# Altium PCB 主板-双BH(1).PcbDoc (part 11 of 13)
Units mm, origin at the board's own origin, x right, y up, seen from the top; angles counter-clockwise.
Board outline 97.69 x 103.45 mm, 2 copper layers (Top Layer, Bottom Layer); 78 components, 75 nets, 243 pads, 279 vias.
Unrouted connection lines stored in the file: 7.
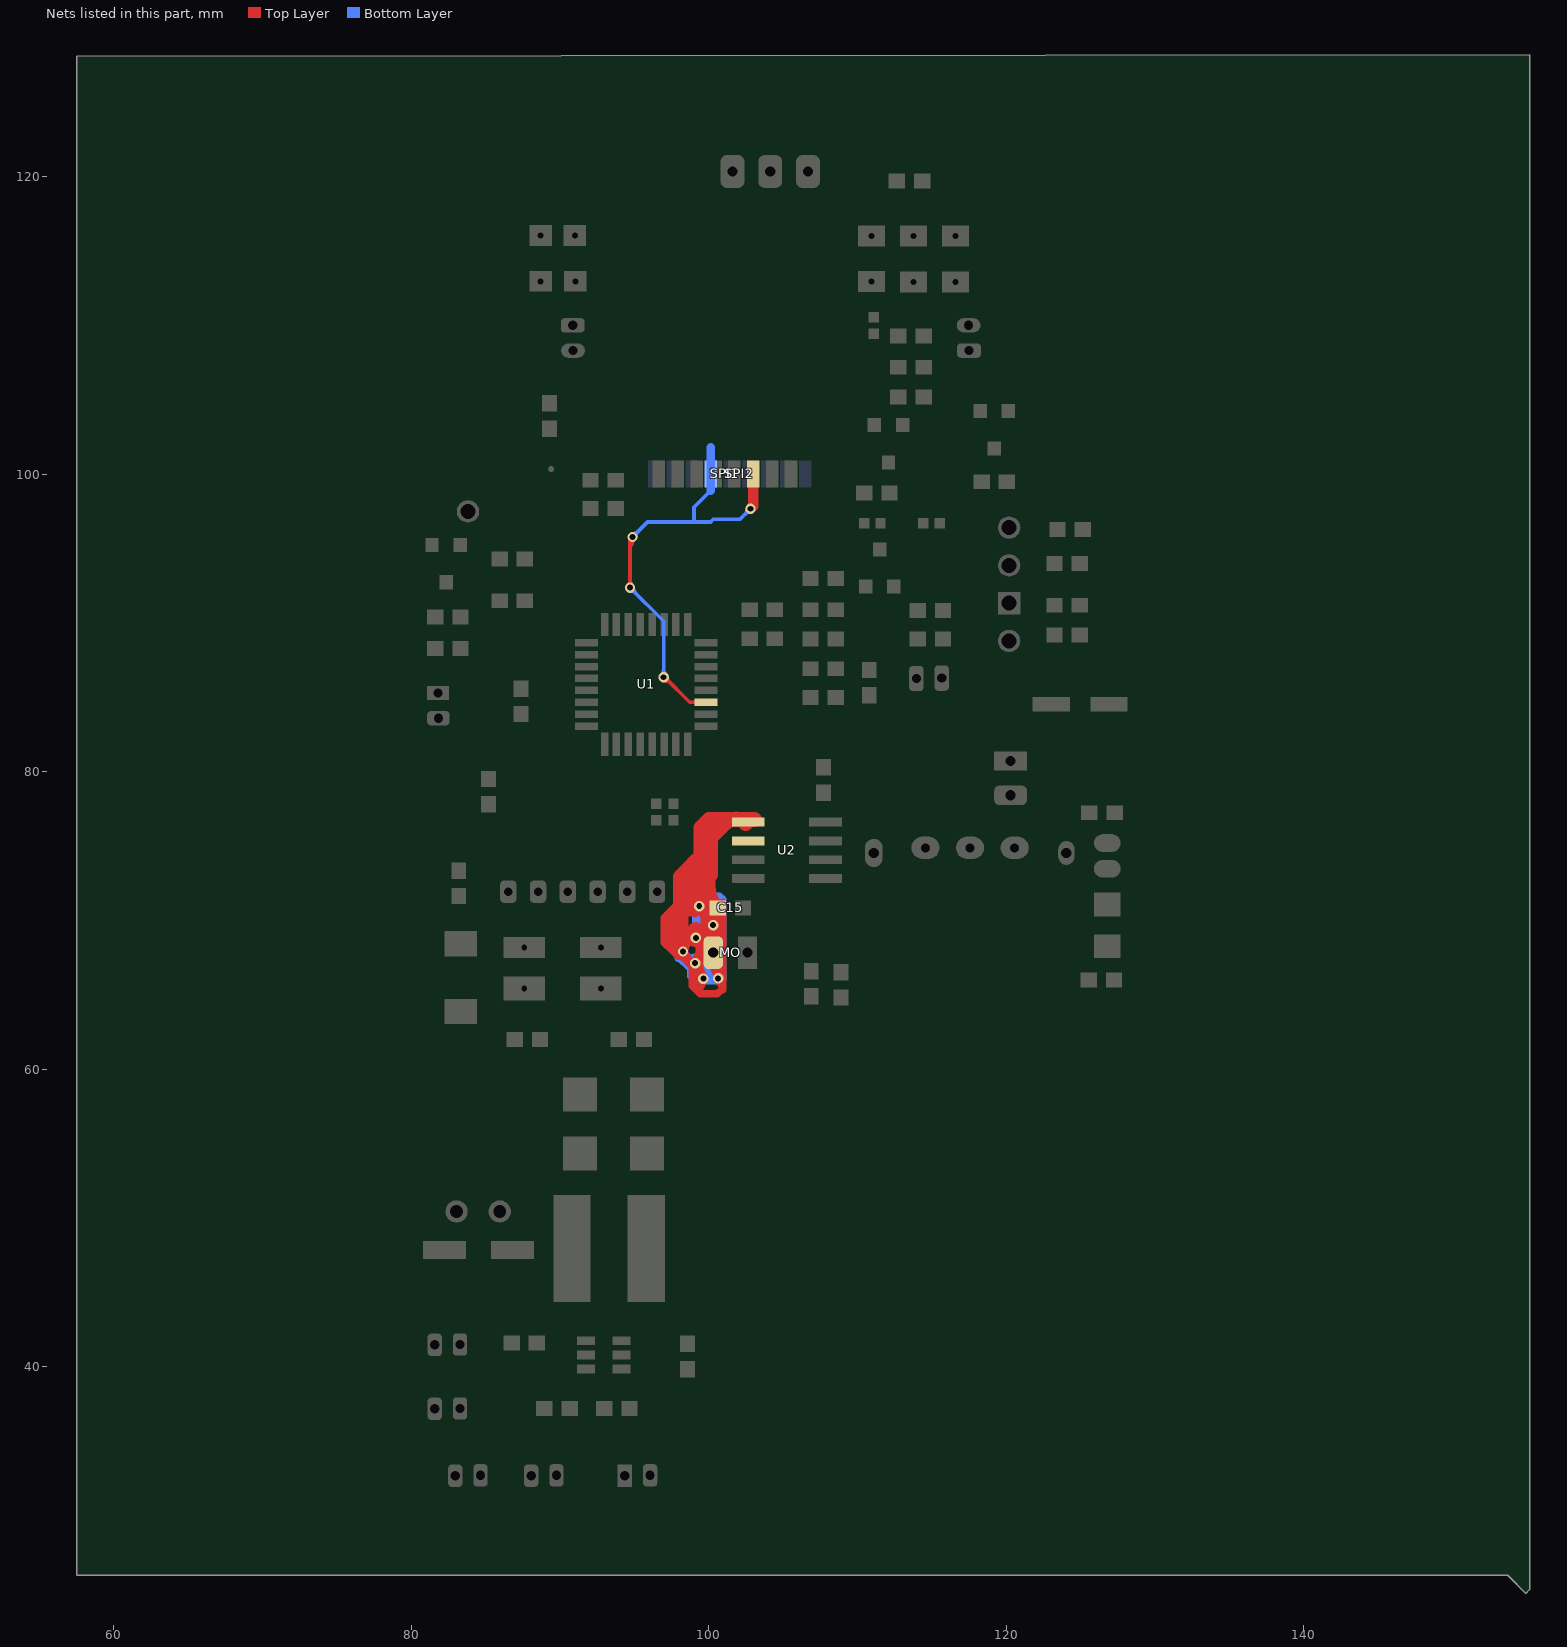
[diagram p11: the nets of this part, all layers, seen from the top]

## Via types
v1: diameter 0.7, hole 0.4, Top Layer to Bottom Layer, 108 vias
v2: diameter 0.68, hole 0.4, Top Layer to Bottom Layer, 87 vias
v3: diameter 0.8, hole 0.5, Top Layer to Bottom Layer, tented both sides, 33 vias
v4: diameter 0.6, hole 0.4, Top Layer to Bottom Layer, 12 vias
v5: diameter 0.9, hole 0.5, Top Layer to Bottom Layer, 8 vias
v6: diameter 0.8, hole 0.5, Top Layer to Bottom Layer, 6 vias
v7: diameter 1, hole 0.75, Top Layer to Bottom Layer, tented both sides, 5 vias
v8: diameter 3.4, hole 2.9, Top Layer to Bottom Layer, 4 vias
v9: diameter 1, hole 0.6, Top Layer to Bottom Layer, tented both sides, 3 vias
v10: diameter 1, hole 0.56, Top Layer to Bottom Layer, tented both sides, 2 vias
v11: diameter 1.1, hole 0.68, Top Layer to Bottom Layer, 2 vias
v12: diameter 0.8, hole 0.4, Top Layer to Bottom Layer, 2 vias
v13: diameter 0.65, hole 0.4, Top Layer to Bottom Layer, tented both sides, 2 vias
v14: diameter 1, hole 0.6, Top Layer to Bottom Layer, tented bottom, 1 vias
v15: diameter 0.7, hole 0.4, Top Layer to Bottom Layer, tented bottom, 1 vias
v16: diameter 0.95, hole 0.5, Top Layer to Bottom Layer, 1 vias
v17: diameter 0.64, hole 0.4, Top Layer to Bottom Layer, 1 vias
v18: diameter 0.62, hole 0.4, Top Layer to Bottom Layer, 1 vias

## Nets (pads, with @x,y where several pads share a name; then routed paths per layer and width w, separated by ;. In a path a pad name is that pad's centre, name@x,y a point inside that pad or via, vN(x,y) a via of type N, cw(c..) or ccw(c..) an arc to the next point about the centre after c; other vN are vias at no path point) (continued)
MOSI: SPI1.3 SPI2.3 U1.3 | length 52.4
  Top Layer w0.254: v2@94.717,92.405 v2@94.717,95.783 ; v2@97.066,86.347 98.73,84.684 U1.3@99.825,84.684 ; v2@94.566,92.53 ccw(c94.202,92.894) 94.717,92.894 ; v2@94.566,92.53 ccw(c94.202,92.894) 94.717,92.894 ; v2@94.566,92.53 ccw(c94.202,92.894) 94.717,92.894 ; 94.717,92.894 ccw(c95.231,92.894) v2@94.867,92.53 ; 94.717,92.894 ccw(c95.231,92.894) v2@94.867,92.53 ; 94.717,92.894 ccw(c95.231,92.894) v2@94.867,92.53 ; 94.717,94.901 cw(c95.751,94.901) v2@95.02,95.633 ; 94.717,94.901 cw(c95.751,94.901) v2@95.02,95.633 ; 94.717,94.901 cw(c95.751,94.901) v2@95.02,95.633 ; v2@94.741,95.613 cw(c94.584,95.403) 94.811,95.272 ; v2@94.741,95.613 cw(c94.584,95.403) 94.811,95.272 ; v2@94.741,95.613 cw(c94.584,95.403) 94.811,95.272 ; v2@96.938,86.347 ccw(c97.322,86.473) 97.218,86.083 ; v2@96.938,86.347 ccw(c97.322,86.473) 97.218,86.083 ; v2@96.938,86.347 ccw(c97.322,86.473) 97.218,86.083 ; v2@96.977,86.147 cw(c96.977,85.449) 97.471,85.943 ; v2@96.977,86.147 cw(c96.977,85.449) 97.471,85.943 ; v2@96.977,86.147 cw(c96.977,85.449) 97.471,85.943 ; v2@97.19,86.36 ccw(c97.52,86.36) 97.287,86.126 ; v2@97.19,86.36 ccw(c97.52,86.36) 97.287,86.126 ; v2@97.19,86.36 ccw(c97.52,86.36) 97.287,86.126 ; 98.988,84.684 cw(c98.988,84.365) U1.3@99.213,84.59 ; 98.988,84.684 cw(c98.988,84.365) U1.3@99.213,84.59 ; 98.988,84.684 cw(c98.988,84.365) U1.3@99.213,84.59 ; 99.018,84.684 ccw(c99.018,84.959) U1.3@99.213,84.764 ; 99.018,84.684 ccw(c99.018,84.959) U1.3@99.213,84.764 ; 99.018,84.684 ccw(c99.018,84.959) U1.3@99.213,84.764
  Top Layer w0.7: v2(102.819,97.688) v2@102.997,97.866 ; 102.997,97.993 SPI1.3@102.997,100.032 ; v2@102.826,97.681 ccw(c102.414,98.094) 102.997,98.094 ; v2@102.826,97.681 ccw(c102.414,98.094) 102.997,98.094 ; v2@102.826,97.681 ccw(c102.414,98.094) 102.997,98.094
  Bottom Layer w0.254: v2(94.717,92.38) 96.977,90.119 v2(96.977,86.36) ; v2(94.869,95.783) 95.885,96.799 100.13,96.799 100.308,96.977 102.108,96.977 v2(102.819,97.688) ; 99.009,96.799 99.009,97.79 100.14,98.921 ; v2@94.717,92.167 cw(c94.717,91.653) 95.08,92.016 ; v2@94.717,92.167 cw(c94.717,91.653) 95.08,92.016 ; v2@94.717,92.167 cw(c94.717,91.653) 95.08,92.016 ; v2@94.869,95.996 ccw(c94.869,96.511) 95.233,96.147 ; v2@94.869,95.996 ccw(c94.869,96.511) 95.233,96.147 ; v2@94.869,95.996 ccw(c94.869,96.511) 95.233,96.147 ; v2@94.93,92.38 ccw(c95.444,92.38) 95.08,92.016 ; v2@94.93,92.38 ccw(c95.444,92.38) 95.08,92.016 ; v2@94.93,92.38 ccw(c95.444,92.38) 95.08,92.016 ; v2@95.082,95.783 cw(c95.596,95.783) 95.233,96.147 ; v2@95.082,95.783 cw(c95.596,95.783) 95.233,96.147 ; v2@95.082,95.783 cw(c95.596,95.783) 95.233,96.147 ; v2@96.827,86.511 ccw(c96.463,86.874) 96.977,86.874 ; v2@96.827,86.511 ccw(c96.463,86.874) 96.977,86.874 ; v2@96.827,86.511 ccw(c96.463,86.874) 96.977,86.874 ; 96.977,86.874 ccw(c97.491,86.874) v2@97.128,86.511 ; 96.977,86.874 ccw(c97.491,86.874) v2@97.128,86.511 ; 96.977,86.874 ccw(c97.491,86.874) v2@97.128,86.511 ; 102.456,97.325 ccw(c102.092,97.688) v2@102.606,97.688 ; 102.456,97.325 cw(c102.819,96.961) v2@102.819,97.475 ; 102.456,97.325 ccw(c102.092,97.688) v2@102.606,97.688 ; 102.456,97.325 cw(c102.819,96.961) v2@102.819,97.475 ; 102.456,97.325 ccw(c102.092,97.688) v2@102.606,97.688 ; 102.456,97.325 cw(c102.819,96.961) v2@102.819,97.475
  Bottom Layer w0.6: 100.14,98.921 100.14,101.803
NetC4_1: C15.1 MO.2 U2.5 U2.6 | length 590
  Top Layer w0.254: 97.206,69.723 97.231,69.698 ; 97.231,70.202 97.231,69.698 ; 97.447,67.958 97.585,67.958 97.828,67.958 ; 97.079,69.367 96.952,69.367 97.231,69.647 ; 97.079,69.367 97.561,69.367 97.257,69.672 ; 97.079,69.367 96.977,69.266 96.977,68.809 97.024,68.762 97.828,67.958 ; 97.079,69.367 97.231,69.52 97.231,69.647 ; 97.198,68.588 ccw(c98.273,69.662) v1@98.273,68.143 ; 97.198,68.588 ccw(c98.273,69.662) v1@98.273,68.143 ; 97.198,68.588 ccw(c98.273,69.662) v1@98.273,68.143 ; 97.231,69.647 97.231,69.698 ; 97.231,69.647 97.257,69.672 ; 97.231,69.698 97.257,69.672 ; 97.632,68.154 ccw(c98.273,68.795) v1@98.273,67.889 ; 97.632,68.154 ccw(c98.273,68.795) v1@98.273,67.889 ; 97.632,68.154 ccw(c98.273,68.795) v1@98.273,67.889 ; 97.642,67.958 cw(c97.642,67.289) v1@98.115,67.762 ; 97.642,67.958 cw(c97.642,67.289) v1@98.115,67.762 ; 97.642,67.958 cw(c97.642,67.289) v1@98.115,67.762 ; 97.826,67.958 ccw(c97.826,68.366) v1@98.115,68.077 ; 97.826,67.958 ccw(c97.826,68.366) v1@98.115,68.077 ; 97.826,67.958 ccw(c97.826,68.366) v1@98.115,68.077 ; 97.828,67.958 ccw(c97.828,68.361) v1@98.114,68.077 ; 97.828,67.958 cw(c97.828,67.672) v1@98.078,67.811 ; 97.828,67.958 ccw(c97.828,68.361) v1@98.114,68.077 ; 97.828,67.958 cw(c97.828,67.672) v1@98.078,67.811 ; 97.828,67.958 ccw(c97.828,68.361) v1@98.114,68.077 ; 97.828,67.958 cw(c97.828,67.672) v1@98.078,67.811 ; 97.87,67.997 ccw(c97.93,68.223) v1@98.106,68.068 ; 97.87,67.997 cw(c97.79,67.7) v1@98.07,67.827 ; 97.87,67.997 ccw(c97.93,68.223) v1@98.106,68.068 ; 97.87,67.997 cw(c97.79,67.7) v1@98.07,67.827 ; 97.87,67.997 ccw(c97.93,68.223) v1@98.106,68.068 ; 97.87,67.997 cw(c97.79,67.7) v1@98.07,67.827 ; 97.898,68.243 cw(c97.727,67.605) v1@98.299,67.935 ; 97.898,68.243 cw(c97.727,67.605) v1@98.299,67.935 ; 97.898,68.243 cw(c97.727,67.605) v1@98.299,67.935
  Top Layer w0.5: 97.184,69.295 97.561,69.672 97.565,69.676 ; 98.091,70.202 97.024,70.202 ; v1@98.095,67.869 v1@98.146,67.818 ; 98.095,70.206 98.4,70.51 ; 98.095,70.507 98.098,70.51 98.4,70.51 ; 98.095,71.272 97.024,70.202 ; 98.179,68.301 98.4,68.301 ; v1(98.273,67.92) 97.968,67.818 v1@98.146,67.818 ; v1@98.294,67.67 v1@98.146,67.818 ; v1@98.882,67.158 98.222,67.818 v1@98.146,67.818 ; v1@99.185,67.142 ccw(c99.684,67.194) 99.386,66.79 ; v1@99.185,67.132 ccw(c99.757,67.132) 99.353,66.728 ; 99.974,71.323 99.162,70.51 ; C15.1@100.94,71.245 100.94,65.43 100.584,65.075 99.416,65.075 99.314,65.176 ; 97.024,70.202 97.024,68.762 97.024,68.518 97.585,67.958 97.928,67.615 98.171,67.615 98.882,66.904 98.882,65.608 99.314,65.176 ; 97.909,67.869 ccw(c97.909,68.284) v1@98.202,67.99 ; 97.909,67.869 ccw(c97.909,68.284) v1@98.202,67.99 ; 97.909,67.869 ccw(c97.909,68.284) v1@98.202,67.99 ; 97.917,67.869 ccw(c97.917,68.263) v1@98.201,67.989 ; 97.917,67.869 ccw(c97.917,68.263) v1@98.201,67.989 ; 97.917,67.869 ccw(c97.917,68.263) v1@98.201,67.989 ; 97.917,67.869 97.828,67.958 97.739,67.869 97.917,67.869 ; v1@98.178,67.608 ccw(c99.085,68.516) v1@99.085,67.232 ; v1@98.178,67.608 ccw(c99.085,68.516) v1@99.085,67.232 ; v1@98.178,67.608 ccw(c99.085,68.516) v1@99.085,67.232 ; v1@98.202,67.99 ccw(c97.725,68.468) 98.4,68.468 ; v1@98.202,67.99 ccw(c97.725,68.468) 98.4,68.468 ; v1@98.202,67.99 ccw(c97.725,68.468) 98.4,68.468 ; v1@98.223,67.833 cw(c97.937,67.338) 98.489,67.486 ; v1@98.223,67.833 cw(c97.937,67.338) 98.489,67.486 ; v1@98.223,67.833 cw(c97.937,67.338) 98.489,67.486 ; v1@98.223,67.833 cw(c97.937,67.338) 98.489,67.486 ; v1@98.223,67.833 cw(c97.937,67.338) 98.489,67.486 ; v1@98.223,67.833 cw(c97.937,67.338) 98.489,67.486 ; v1@98.225,68.008 ccw(c98.066,68.301) 98.4,68.301 ; v1@98.225,68.008 ccw(c98.066,68.301) 98.4,68.301 ; v1@98.225,68.008 ccw(c98.066,68.301) 98.4,68.301 ; v1@98.24,67.825 cw(c98.057,67.284) 98.569,67.537 ; v1@98.24,67.825 cw(c98.057,67.284) 98.569,67.537 ; v1@98.24,67.825 cw(c98.057,67.284) 98.569,67.537 ; v1@98.24,67.825 cw(c98.057,67.284) 98.569,67.537 ; v1@98.371,67.939 ccw(c99.474,68.159) v1@98.912,67.184 ; v1@98.371,67.939 ccw(c99.474,68.159) v1@98.912,67.184 ; v1@98.371,67.939 ccw(c99.474,68.159) v1@98.912,67.184 ; v1@98.371,67.939 ccw(c99.474,68.159) v1@98.912,67.184 ; v1@98.371,67.939 ccw(c99.474,68.159) v1@98.912,67.184 ; v1@98.371,67.939 ccw(c99.474,68.159) v1@98.912,67.184 ; v1@98.373,67.92 ccw(c98.982,67.92) 98.551,67.489 ; v1@98.373,67.92 ccw(c99.595,67.92) 98.731,67.055 ; v1@98.373,67.92 ccw(c98.982,67.92) 98.551,67.489 ; v1@98.373,67.92 ccw(c99.595,67.92) 98.731,67.055 ; v1@98.373,67.92 ccw(c98.982,67.92) 98.551,67.489 ; v1@98.373,67.92 ccw(c99.595,67.92) 98.731,67.055 ; 98.4,68.301 98.4,68.69 98.4,70.51 ; 98.4,70.51 ccw(c98.4,71.525) v1@99.278,71.018 ; 98.4,70.51 ccw(c98.4,71.525) v1@99.278,71.018 ; 98.4,70.51 ccw(c98.4,71.525) v1@99.278,71.018 ; 98.4,70.51 99.162,70.51 ; 98.611,67.429 ccw(c99.085,67.903) v1@99.085,67.232 ; 98.611,67.429 ccw(c99.085,67.903) v1@99.085,67.232 ; 98.611,67.429 ccw(c99.085,67.903) v1@99.085,67.232 ; 98.652,67.348 cw(c98.504,66.797) v1@98.999,67.082 ; 98.652,67.348 cw(c98.504,66.797) v1@98.999,67.082 ; 98.652,67.348 cw(c98.504,66.797) v1@98.999,67.082 ; 98.652,67.348 cw(c98.504,66.797) v1@98.999,67.082 ; 98.652,67.348 cw(c98.504,66.797) v1@98.999,67.082 ; 98.652,67.348 cw(c98.504,66.797) v1@98.999,67.082 ; 98.707,67.389 ccw(c99.085,67.767) v1@99.085,67.232 ; 98.707,67.389 ccw(c99.085,67.767) v1@99.085,67.232 ; 98.707,67.389 ccw(c99.085,67.767) v1@99.085,67.232 ; 98.707,67.389 ccw(c99.085,67.767) v1@99.085,67.232 ; 98.882,66.4 cw(c99.817,66.4) v1@99.156,67.061 ; 98.882,66.4 cw(c99.817,66.4) v1@99.156,67.061 ; 98.882,66.4 cw(c99.817,66.4) v1@99.156,67.061 ; 98.942,66.691 ccw(c98.489,66.952) v1@98.99,67.103 ; 98.942,66.691 ccw(c98.489,66.952) v1@98.99,67.103 ; 98.942,66.691 ccw(c98.489,66.952) v1@98.99,67.103 ; 98.961,70.7 cw(c99.365,70.296) v1@99.365,70.868 ; 98.961,70.7 cw(c99.365,70.296) v1@99.365,70.868 ; 98.961,70.7 cw(c99.365,70.296) v1@99.365,70.868 ; v1@99.015,67.061 cw(c98.108,66.155) v1@99.39,66.155 ; v1@99.015,67.061 cw(c98.108,66.155) v1@99.39,66.155 ; v1@99.015,67.061 cw(c98.108,66.155) v1@99.39,66.155 ; v1@99.015,67.203 ccw(c98.108,68.109) 99.39,68.109 ; v1@99.015,67.203 ccw(c98.108,68.109) 99.39,68.109 ; v1@99.015,67.203 ccw(c98.108,68.109) 99.39,68.109 ; v1@99.035,67.046 cw(c98.495,66.109) v1@99.539,66.389 ; v1@99.035,67.046 cw(c98.495,66.109) v1@99.539,66.389 ; v1@99.035,67.046 cw(c98.495,66.109) v1@99.539,66.389 ; v1@99.049,67.039 cw(c98.774,66.339) 99.501,66.534 ; v1@99.049,67.039 cw(c98.774,66.339) 99.501,66.534 ; v1@99.049,67.039 cw(c98.774,66.339) 99.501,66.534 ; v1@99.065,68.763 cw(c98.282,67.979) 99.39,67.979 ; v1@99.065,68.763 cw(c98.282,67.979) 99.39,67.979 ; v1@99.065,68.763 cw(c98.282,67.979) 99.39,67.979 ; 99.068,70.448 ccw(c98.807,70.841) v1@99.267,70.946 ; 99.068,70.448 ccw(c98.807,70.841) v1@99.267,70.946 ; 99.068,70.448 ccw(c98.807,70.841) v1@99.267,70.946 ; 99.068,70.448 ccw(c98.807,70.841) v1@99.267,70.946 ; 99.068,70.448 ccw(c98.807,70.841) v1@99.267,70.946 ; 99.068,70.448 ccw(c98.807,70.841) v1@99.267,70.946 ; v1@99.093,68.924 ccw(c98.872,69.393) 99.39,69.393 ; v1@99.093,68.924 ccw(c98.872,69.393) 99.39,69.393 ; v1@99.093,68.924 ccw(c98.872,69.393) 99.39,69.393 ; 99.162,70.51 cw(c99.873,69.799) C15.1@100.423,70.641 ; 99.162,70.51 ccw(c98.858,70.814) v1@99.269,70.939 ; 99.162,70.51 cw(c99.873,69.799) C15.1@100.423,70.641 ; 99.162,70.51 ccw(c98.858,70.814) v1@99.269,70.939 ; 99.162,70.51 cw(c99.873,69.799) C15.1@100.423,70.641 ; 99.162,70.51 ccw(c98.858,70.814) v1@99.269,70.939 ; v1@99.182,67.106 ccw(c99.588,66.998) 99.224,66.788 ; v1@99.182,67.106 ccw(c99.734,66.958) 99.239,66.673 ; v1@99.182,67.106 ccw(c99.588,66.998) 99.224,66.788 ; v1@99.182,67.106 ccw(c99.588,66.998) 99.224,66.788 ; v1@99.182,67.106 ccw(c99.588,66.998) 99.224,66.788 ; v1@99.182,67.106 ccw(c99.734,66.958) 99.239,66.673 ; v1@99.182,67.106 ccw(c99.734,66.958) 99.239,66.673 ; v1@99.182,67.158 cw(c99.734,67.306) 99.239,67.592 ; v1@99.182,67.158 cw(c99.734,67.306) 99.239,67.592 ; v1@99.182,67.158 cw(c99.734,67.306) 99.239,67.592 ; 99.218,66.798 ccw(c100.205,67.063) v1@99.694,66.177 ; 99.218,66.798 ccw(c100.205,67.063) v1@99.694,66.177 ; 99.218,66.798 ccw(c100.205,67.063) v1@99.694,66.177 ; 99.218,66.798 ccw(c100.205,67.063) v1@99.694,66.177 ; 99.218,66.798 ccw(c100.205,67.063) v1@99.694,66.177 ; 99.218,66.798 ccw(c100.205,67.063) v1@99.694,66.177 ; v1@99.233,68.808 ccw(c99.785,68.66) 99.29,68.375 ; v1@99.233,68.808 ccw(c99.785,68.66) 99.29,68.375 ; v1@99.233,68.808 ccw(c99.785,68.66) 99.29,68.375 ; 99.307,68.472 ccw(c99.245,68.604) v1@99.39,68.604 ; 99.307,68.472 ccw(c99.245,68.604) v1@99.39,68.604 ; 99.307,68.472 ccw(c99.245,68.604) v1@99.39,68.604 ; 99.314,65.176 99.39,65.176 99.39,69.393 ; v1@99.365,71.068 ccw(c99.365,71.922) 99.969,71.318 ; v1@99.365,71.068 ccw(c99.365,71.922) 99.969,71.318 ; v1@99.365,71.068 ccw(c99.365,71.922) 99.969,71.318 ; 99.377,66.495 cw(c98.973,66.091) v1@99.544,66.091 ; 99.377,66.495 cw(c98.973,66.091) v1@99.544,66.091 ; 99.377,66.495 cw(c98.973,66.091) v1@99.544,66.091 ; 99.377,66.495 cw(c98.973,66.091) v1@99.544,66.091 ; v1@99.381,70.869 cw(c99.476,70.306) 99.807,70.771 ; v1@99.381,70.869 cw(c99.476,70.306) 99.807,70.771 ; v1@99.381,70.869 cw(c99.476,70.306) 99.807,70.771 ; v1@99.381,70.869 cw(c99.476,70.306) 99.807,70.771 ; 99.39,65.236 cw(c100.499,65.236) v1@99.715,66.02 ; 99.39,65.236 cw(c100.499,65.236) v1@99.715,66.02 ; 99.39,65.236 cw(c100.499,65.236) v1@99.715,66.02 ; 99.39,66.945 ccw(c100.499,66.945) v1@99.715,66.162 ; 99.39,66.945 ccw(c100.499,66.945) v1@99.715,66.162 ; 99.39,66.945 ccw(c100.499,66.945) v1@99.715,66.162 ; 99.39,69.393 cw(c100.002,68.781) v1@100.273,69.603 ; 99.39,69.393 cw(c100.002,68.781) v1@100.273,69.603 ; 99.39,69.393 cw(c100.002,68.781) v1@100.273,69.603 ; 99.39,69.393 99.974,69.977 ; v1@99.391,71.064 ccw(c99.573,71.738) 99.922,71.133 ; v1@99.391,71.064 ccw(c99.573,71.738) 99.922,71.133 ; v1@99.391,71.064 ccw(c99.573,71.738) 99.922,71.133 ; v1@99.391,71.064 ccw(c99.573,71.738) 99.922,71.133 ; v1@99.391,71.064 ccw(c99.573,71.738) 99.922,71.133 ; v1@99.391,71.064 ccw(c99.573,71.738) 99.922,71.133 ; v1@99.435,70.897 cw(c99.838,70.492) 99.84,71.063 ; v1@99.435,70.897 cw(c99.838,70.492) 99.84,71.063 ; v1@99.435,70.897 cw(c99.838,70.492) 99.84,71.063 ; v1@99.435,70.897 cw(c99.838,70.492) 99.84,71.063 ; v1@99.442,71.031 ccw(c100.22,71.673) C15.1@100.124,70.669 ; v1@99.442,71.031 ccw(c100.22,71.673) C15.1@100.124,70.669 ; v1@99.442,71.031 ccw(c100.22,71.673) C15.1@100.124,70.669 ; v1@99.442,71.031 ccw(c100.22,71.673) C15.1@100.124,70.669 ; v1@99.442,71.031 ccw(c100.22,71.673) C15.1@100.124,70.669 ; v1@99.442,71.031 ccw(c100.22,71.673) C15.1@100.124,70.669 ; v1@99.451,70.918 cw(c99.946,70.632) 99.798,71.184 ; v1@99.451,70.918 cw(c99.946,70.632) 99.798,71.184 ; v1@99.451,70.918 cw(c99.946,70.632) 99.798,71.184 ; 99.491,65.631 ccw(c98.996,65.917) v1@99.548,66.065 ; 99.491,65.631 ccw(c98.996,65.917) v1@99.548,66.065 ; 99.491,65.631 ccw(c98.996,65.917) v1@99.548,66.065 ; 99.491,66.55 cw(c98.996,66.265) v1@99.548,66.117 ; 99.491,66.55 cw(c98.996,66.265) v1@99.548,66.117 ; 99.491,66.55 cw(c98.996,66.265) v1@99.548,66.117 ; 99.504,66.451 cw(c99.122,66.231) v1@99.548,66.117 ; 99.504,66.451 cw(c99.122,66.231) v1@99.548,66.117 ; 99.504,66.451 cw(c99.122,66.231) v1@99.548,66.117 ; 99.504,66.451 cw(c99.122,66.231) v1@99.548,66.117 ; v1@99.597,70.946 cw(c100.217,70.325) C15.1@100.697,71.059 ; v1@99.597,70.946 cw(c100.217,70.325) C15.1@100.697,71.059 ; v1@99.597,70.946 cw(c100.217,70.325) C15.1@100.697,71.059 ; 99.93,69.622 ccw(c99.95,69.967) v1@100.225,69.758 ; 99.93,69.622 ccw(c99.95,69.967) v1@100.225,69.758 ; 99.93,69.622 ccw(c99.95,69.967) v1@100.225,69.758 ; 99.974,69.977 ccw(c99.161,70.79) C15.1@100.31,70.839 ; 99.974,69.977 ccw(c99.161,70.79) C15.1@100.31,70.839 ; 99.974,69.977 ccw(c99.161,70.79) C15.1@100.31,70.839 ; 99.974,69.977 C15.1@100.65,70.653 ; MO.2@100.025,68.573 ccw(c97.818,70.781) C15.1@100.94,70.781 ; MO.2@100.025,68.573 ccw(c97.818,70.781) C15.1@100.94,70.781 ; MO.2@100.025,68.573 ccw(c97.818,70.781) C15.1@100.94,70.781 ; MO.2@100.069,67.07 cw(c98.769,65.331) 100.94,65.331 ; MO.2@100.069,67.07 cw(c98.769,65.331) 100.94,65.331 ; MO.2@100.069,67.07 cw(c98.769,65.331) 100.94,65.331 ; MO.2@100.11,68.693 ccw(c99.306,69.266) v1@100.213,69.658 ; MO.2@100.11,68.693 ccw(c99.306,69.266) v1@100.213,69.658 ; MO.2@100.11,68.693 ccw(c99.306,69.266) v1@100.213,69.658 ; MO.2@100.11,68.693 ccw(c99.306,69.266) v1@100.213,69.658 ; MO.2@100.11,68.693 ccw(c99.306,69.266) v1@100.213,69.658 ; MO.2@100.11,68.693 ccw(c99.306,69.266) v1@100.213,69.658 ; MO.2@100.218,68.247 cw(c100.906,68.575) 100.246,68.956 ; MO.2@100.218,68.247 cw(c100.906,68.575) 100.246,68.956 ; MO.2@100.218,68.247 cw(c100.906,68.575) 100.246,68.956 ; v1@100.234,69.768 ccw(c99.83,70.172) 100.401,70.172 ; v1@100.234,69.768 ccw(c99.83,70.172) 100.401,70.172 ; v1@100.234,69.768 ccw(c99.83,70.172) 100.401,70.172 ; v1@100.239,69.622 cw(c99.452,68.721) MO.2@100.646,68.802 ; v1@100.239,69.622 cw(c99.452,68.721) MO.2@100.646,68.802 ; v1@100.239,69.622 cw(c99.452,68.721) MO.2@100.646,68.802 ; v1@100.239,69.622 cw(c99.452,68.721) MO.2@100.646,68.802 ; v1@100.239,69.622 cw(c99.452,68.721) MO.2@100.646,68.802 ; v1@100.239,69.622 cw(c99.452,68.721) MO.2@100.646,68.802 ; v1@100.239,69.622 cw(c99.452,68.721) MO.2@100.646,68.802 ; v1@100.239,69.622 cw(c99.452,68.721) MO.2@100.646,68.802 ; MO.2@100.251,68.686 ccw(c100.124,69.575) 100.902,69.126 ; MO.2@100.251,68.686 ccw(c100.124,69.575) 100.902,69.126 ; MO.2@100.251,68.686 ccw(c100.124,69.575) 100.902,69.126 ; v1@100.252,69.782 ccw(c99.445,71.073) C15.1@100.928,70.731 ; v1@100.252,69.782 ccw(c99.445,71.073) C15.1@100.928,70.731 ; v1@100.252,69.782 ccw(c99.445,71.073) C15.1@100.928,70.731 ; v1@100.252,69.782 ccw(c99.445,71.073) C15.1@100.928,70.731 ; v1@100.252,69.782 ccw(c99.445,71.073) C15.1@100.928,70.731 ; v1@100.252,69.782 ccw(c99.445,71.073) C15.1@100.928,70.731 ; v1@100.31,69.797 ccw(c100.338,70.267) 100.797,70.162 ; v1@100.31,69.797 ccw(c100.338,70.267) 100.797,70.162 ; v1@100.31,69.797 ccw(c100.338,70.267) 100.797,70.162 ; v1@100.31,69.797 ccw(c100.338,70.267) 100.797,70.162 ; v1@100.31,69.797 ccw(c100.338,70.267) 100.797,70.162 ; v1@100.31,69.797 ccw(c100.338,70.267) 100.797,70.162 ; MO.2@100.368,67.47 cw(c99.515,66.329) 100.94,66.329 ; MO.2@100.368,67.47 cw(c99.515,66.329) 100.94,66.329 ; MO.2@100.368,67.47 cw(c99.515,66.329) 100.94,66.329 ; MO.2@100.379,68.22 ccw(c99.025,69.574) 100.94,69.574 ; MO.2@100.379,68.22 ccw(c99.025,69.574) 100.94,69.574 ; MO.2@100.379,68.22 ccw(c99.025,69.574) 100.94,69.574 ; C15.1@100.395,70.663 cw(c100.208,70.451) 100.452,70.31 ; C15.1@100.395,70.663 cw(c100.208,70.451) 100.452,70.31 ; C15.1@100.395,70.663 cw(c100.208,70.451) 100.452,70.31 ; 100.402,66.634 cw(c99.86,66.22) v1@100.536,66.129 ; 100.402,66.634 cw(c99.86,66.22) v1@100.536,66.129 ; 100.402,66.634 cw(c99.86,66.22) v1@100.536,66.129 ; 100.402,66.634 cw(c99.86,66.22) v1@100.536,66.129 ; 100.402,66.634 cw(c99.86,66.22) v1@100.536,66.129 ; 100.402,66.634 cw(c99.86,66.22) v1@100.536,66.129 ; v1@100.401,69.724 cw(c101.33,69.973) C15.1@100.65,70.653 ; v1@100.401,69.724 cw(c101.33,69.973) C15.1@100.65,70.653 ; v1@100.401,69.724 cw(c101.33,69.973) C15.1@100.65,70.653 ; v1@100.405,69.701 cw(c100.975,69.721) 100.558,70.111 ; v1@100.405,69.701 cw(c100.975,69.721) 100.558,70.111 ; v1@100.405,69.701 cw(c100.975,69.721) 100.558,70.111 ; v1@100.405,69.701 cw(c100.975,69.721) 100.558,70.111 ; C15.1@100.414,70.647 cw(c99.987,70.053) 100.694,69.863 ; C15.1@100.414,70.647 cw(c99.987,70.053) 100.694,69.863 ; C15.1@100.414,70.647 cw(c99.987,70.053) 100.694,69.863 ; 100.478,66.574 ccw(c101.045,66.648) v1@100.696,66.195 ; 100.478,66.574 ccw(c101.045,66.648) v1@100.696,66.195 ; 100.478,66.574 ccw(c101.045,66.648) v1@100.696,66.195 ; 100.478,66.574 ccw(c101.045,66.648) v1@100.696,66.195 ; C15.1@100.483,70.673 cw(c99.381,69.571) 100.94,69.571 ; C15.1@100.483,70.673 cw(c99.381,69.571) 100.94,69.571 ; C15.1@100.483,70.673 cw(c99.381,69.571) 100.94,69.571 ; v1@100.552,66.172 ccw(c100.233,66.387) 100.586,66.539 ; v1@100.552,66.172 ccw(c100.233,66.387) 100.586,66.539 ; v1@100.552,66.172 ccw(c100.233,66.387) 100.586,66.539 ; v1@100.552,66.172 ccw(c100.233,66.387) 100.586,66.539 ; v1@100.564,66.187 ccw(c99.658,67.093) MO.2@100.94,67.093 ; v1@100.564,66.187 ccw(c99.658,67.093) MO.2@100.94,67.093 ; v1@100.564,66.187 ccw(c99.658,67.093) MO.2@100.94,67.093 ; v1@100.579,66.034 cw(c100.149,65.403) 100.899,65.545 ; v1@100.579,66.034 cw(c100.149,65.403) 100.899,65.545 ; v1@100.579,66.034 cw(c100.149,65.403) 100.899,65.545 ; v1@100.579,66.034 cw(c100.149,65.403) 100.899,65.545 ; v1@100.579,66.034 cw(c100.149,65.403) 100.899,65.545 ; v1@100.579,66.034 cw(c100.149,65.403) 100.899,65.545 ; v1@100.58,66.033 cw(c100.142,65.366) 100.94,65.366 ; v1@100.58,66.033 cw(c100.142,65.366) 100.94,65.366 ; v1@100.58,66.033 cw(c100.142,65.366) 100.94,65.366 ; MO.2@100.65,67.183 ccw(c101.343,66.762) v1@100.706,66.26 ; MO.2@100.65,67.183 ccw(c101.343,66.762) v1@100.706,66.26 ; MO.2@100.65,67.183 ccw(c101.343,66.762) v1@100.706,66.26 ; MO.2@100.669,68.462 cw(c101.949,69.071) 100.722,69.78 ; MO.2@100.669,68.462 cw(c101.949,69.071) 100.722,69.78 ; MO.2@100.669,68.462 cw(c101.949,69.071) 100.722,69.78 ; MO.2@100.694,68.394 cw(c101.309,68.558) MO.2@100.758,68.876 ; MO.2@100.694,68.394 cw(c101.309,68.558) MO.2@100.758,68.876 ; MO.2@100.694,68.394 cw(c101.309,68.558) MO.2@100.758,68.876 ; v1@100.731,66.142 cw(c101.283,66.29) 100.788,66.576 ; v1@100.731,66.142 cw(c101.283,66.29) 100.788,66.576 ; v1@100.731,66.142 cw(c101.283,66.29) 100.788,66.576 ; v1@100.733,66.097 ccw(c101.144,66.019) 100.827,65.745 ; v1@100.733,66.097 ccw(c101.144,66.019) 100.827,65.745 ; v1@100.733,66.097 ccw(c101.144,66.019) 100.827,65.745 ; v1@100.733,66.097 ccw(c101.144,66.019) 100.827,65.745 ; v1@100.734,66.103 ccw(c101.193,66.041) 100.847,65.733 ; v1@100.734,66.103 ccw(c101.193,66.041) 100.847,65.733 ; v1@100.734,66.103 ccw(c101.193,66.041) 100.847,65.733 ; 100.817,70.095 cw(c101.285,70.366) C15.1@100.858,70.697 ; 100.817,70.095 cw(c101.285,70.366) C15.1@100.858,70.697 ; 100.817,70.095 cw(c101.285,70.366) C15.1@100.858,70.697 ; v1@100.403,69.678 ccw(c100.963,69.568) 100.489,69.25 cw(c100.963,69.568) v1@100.403,69.678
  Top Layer w1: 97.561,69.672 97.561,69.367 97.561,68.918 98.095,68.385 ; 97.565,69.676 98.091,70.202 ; 98.098,70.51 98.505,70.917 98.628,70.917 ; 98.179,68.301 98.095,68.385 ; 99.974,71.323 99.974,69.977 ; 99.974,71.425 99.974,73.228 ; 99.974,75.082 99.974,73.228 ; MO.2@100.533,67.691 99.974,68.25 99.974,69.977 ; 101.346,76.784 100.127,75.565 100.127,73.076 99.974,73.228 ; U2.5@102.489,76.505 U2.5@102.768,76.784 ; U2.5@103.073,76.784 100.025,76.784 99.466,76.225 99.466,74.32 98.095,72.949 98.095,71.272 98.095,70.507 98.095,70.206 98.095,68.385 ; 98.095,68.385 98.4,68.69 ; v1@98.123,67.92 cw(c99.313,67.92) 98.471,68.761 ; v1@98.123,67.92 cw(c99.313,67.92) 98.471,68.761 ; v1@98.123,67.92 cw(c99.313,67.92) 98.471,68.761 ; v1@98.124,67.903 cw(c99.08,68.009) 98.4,68.69 ; v1@98.124,67.903 cw(c99.08,68.009) 98.4,68.69 ; v1@98.124,67.903 cw(c99.08,68.009) 98.4,68.69 ; v1@98.124,67.903 cw(c99.08,68.009) 98.4,68.69 ; v1@98.124,67.903 cw(c99.08,68.009) 98.4,68.69 ; v1@98.124,67.903 cw(c99.08,68.009) 98.4,68.69 ; 98.381,68.671 cw(c99.136,67.916) v1@99.136,68.984 ; 98.381,68.671 cw(c99.136,67.916) v1@99.136,68.984 ; 98.381,68.671 cw(c99.136,67.916) v1@99.136,68.984 ; 98.4,68.69 cw(c99.111,67.978) v1@99.141,68.984 ; 98.4,68.69 cw(c99.111,67.978) v1@99.141,68.984 ; 98.4,68.69 cw(c99.111,67.978) v1@99.141,68.984 ; 98.4,68.69 cw(c99.111,67.978) v1@99.141,68.984 ; 98.4,68.69 cw(c99.111,67.978) v1@99.141,68.984 ; 98.4,68.69 cw(c99.111,67.978) v1@99.141,68.984 ; 98.4,68.69 99.103,69.393 ; 98.628,70.917 cw(c99.18,70.365) v1@99.409,71.111 ; 98.628,70.917 cw(c99.18,70.365) v1@99.409,71.111 ; 98.628,70.917 cw(c99.18,70.365) v1@99.409,71.111 ; 98.628,70.917 98.984,71.272 98.984,73.863 99.162,74.041 99.974,73.228 ; 98.984,71.525 ccw(c99.922,71.525) v1@99.259,70.862 ; 98.984,71.525 ccw(c99.922,71.525) v1@99.259,70.862 ; 98.984,71.525 ccw(c99.922,71.525) v1@99.259,70.862 ; v1@99.002,68.766 cw(c99.485,69.01) 99.103,69.393 ; v1@99.002,68.766 cw(c99.485,69.01) 99.103,69.393 ; v1@99.002,68.766 cw(c99.485,69.01) 99.103,69.393 ; v1@99.193,68.973 cw(c98.722,67.812) MO.2@99.974,67.812 ; v1@99.193,68.973 cw(c98.722,67.812) MO.2@99.974,67.812 ; v1@99.193,68.973 cw(c98.722,67.812) MO.2@99.974,67.812 ; v1@99.206,68.701 ccw(c98.531,69.977) 99.974,69.977 ; v1@99.206,68.701 ccw(c98.531,69.977) 99.974,69.977 ; v1@99.206,68.701 ccw(c98.531,69.977) 99.974,69.977 ; v1@99.471,70.862 ccw(c98.255,72.077) 99.974,72.077 ; v1@99.471,70.862 ccw(c98.255,72.077) 99.974,72.077 ; v1@99.471,70.862 ccw(c98.255,72.077) 99.974,72.077 ; v1@99.471,71.074 cw(c98.255,69.858) 99.974,69.858 ; v1@99.471,71.074 cw(c98.255,69.858) 99.974,69.858 ; v1@99.471,71.074 cw(c98.255,69.858) 99.974,69.858 ; 99.776,69.236 cw(c100.716,68.984) v1@100.23,69.828 ; 99.776,69.236 cw(c100.716,68.984) v1@100.23,69.828 ; 99.776,69.236 cw(c100.716,68.984) v1@100.23,69.828 ; 99.799,69.322 cw(c100.547,69.122) v1@100.246,69.836 ; 99.799,69.322 cw(c100.547,69.122) v1@100.246,69.836 ; 99.799,69.322 cw(c100.547,69.122) v1@100.246,69.836 ; 99.957,69.923 ccw(c100.522,70.074) v1@100.23,69.568 ; 99.957,69.923 ccw(c100.522,70.074) v1@100.23,69.568 ; 99.957,69.923 ccw(c100.522,70.074) v1@100.23,69.568 ; 99.957,69.923 ccw(c100.522,70.074) v1@100.23,69.568 ; 99.957,69.923 ccw(c100.522,70.074) v1@100.23,69.568 ; 99.957,69.923 ccw(c100.522,70.074) v1@100.23,69.568 ; 99.957,69.923 ccw(c100.522,70.074) v1@100.23,69.568 ; 99.957,69.923 ccw(c100.522,70.074) v1@100.23,69.568 ; 99.957,69.923 ccw(c100.522,70.074) v1@100.23,69.568 ; 99.957,69.923 ccw(c100.522,70.074) v1@100.23,69.568 ; 99.957,69.923 ccw(c100.522,70.074) v1@100.23,69.568 ; 99.957,69.923 ccw(c100.522,70.074) v1@100.23,69.568 ; 99.974,69.263 cw(c100.74,69.263) v1@100.199,69.804 ; 99.974,69.263 cw(c100.74,69.263) v1@100.199,69.804 ; 99.974,69.263 cw(c100.74,69.263) v1@100.199,69.804 ; 99.974,69.436 cw(c101.974,69.436) C15.1@100.56,70.85 ; 99.974,69.436 cw(c101.974,69.436) C15.1@100.56,70.85 ; 99.974,69.436 cw(c101.974,69.436) C15.1@100.56,70.85 ; 99.974,69.458 ccw(c101.476,69.458) MO.2@100.414,68.396 ; 99.974,69.458 ccw(c101.476,69.458) MO.2@100.414,68.396 ; 99.974,69.458 ccw(c101.476,69.458) MO.2@100.414,68.396 ; v1@99.974,69.799 cw(c101.211,69.799) C15.1@100.56,70.85 ; v1@99.974,69.799 cw(c101.211,69.799) C15.1@100.56,70.85 ; v1@99.974,69.799 cw(c101.211,69.799) C15.1@100.56,70.85 ; v1@99.974,69.799 cw(c101.211,69.799) C15.1@100.56,70.85 ; v1@99.974,69.799 cw(c101.211,69.799) C15.1@100.56,70.85 ; v1@99.974,69.799 cw(c101.211,69.799) C15.1@100.56,70.85 ; 99.974,70.133 ccw(c100.74,70.133) v1@100.199,69.592 ; 99.974,70.133 ccw(c100.74,70.133) v1@100.199,69.592 ; 99.974,70.133 ccw(c100.74,70.133) v1@100.199,69.592 ; 99.974,72.264 ccw(c101.974,72.264) C15.1@100.56,70.85 ; 99.974,72.264 ccw(c101.974,72.264) C15.1@100.56,70.85 ; 99.974,72.264 ccw(c101.974,72.264) C15.1@100.56,70.85 ; 99.999,69.526 cw(c100.478,69.398) v1@100.23,69.828 ; 99.999,69.526 cw(c100.478,69.398) v1@100.23,69.828 ; 99.999,69.526 cw(c100.478,69.398) v1@100.23,69.828 ; 99.999,69.526 cw(c100.478,69.398) v1@100.23,69.828 ; 99.999,69.526 cw(c100.478,69.398) v1@100.23,69.828 ; 99.999,69.526 cw(c100.478,69.398) v1@100.23,69.828 ; 100.078,68.979 cw(c99.335,68.551) MO.2@100.163,68.329 ; 100.078,68.979 cw(c99.335,68.551) MO.2@100.163,68.329 ; 100.078,68.979 cw(c99.335,68.551) MO.2@100.163,68.329 ; 101.06,76.498 cw(c101.854,75.704) U2.5@101.854,76.827 ; 101.06,76.498 cw(c101.854,75.704) U2.5@101.854,76.827 ; 101.06,76.498 cw(c101.854,75.704) U2.5@101.854,76.827
  Bottom Layer w0.5: v1(98.273,67.92) 98.781,67.412 98.781,66.751 ; v1(99.136,68.834) v1@99.136,69.113 ; 99.293,70.201 99.2,70.294 ; 99.6,69.698 cw(c100.045,69.698) 99.73,70.012 ; v1(99.644,66.091) v1@99.924,65.938 ; v1@99.657,66.027 99.67,66.04 MO.2@99.67,67.081 ; 99.984,69.335 cw(c100.478,69.049) v1@100.33,69.601 ; 100,71.068 ccw(c100,71.738) 100.474,71.264 ; 100.041,71.059 ccw(c100.373,71.788) 100.94,71.222 ; 100.051,66.497 100.127,66.573 100.584,66.116 v1@100.584,69.545 ; 100.076,71.032 cw(c100.426,71.329) 100.101,71.653 ; 100.1,70.968 cw(c100.648,70.968) 100.26,71.355 ; 97.968,67.451 cw(c98.341,67.451) v1@98.287,67.821 ; 97.968,67.451 cw(c98.341,67.451) v1@98.287,67.821 ; 97.968,67.451 cw(c98.341,67.451) v1@98.287,67.821 ; 97.968,67.564 ccw(c98.829,68.426) v1@99.066,67.23 ; 97.968,67.564 ccw(c98.829,68.426) v1@99.066,67.23 ; 97.968,67.564 ccw(c98.829,68.426) v1@99.066,67.23 ; 97.968,67.564 97.968,67.945 v1@99.136,69.113 ; 97.968,67.564 98.781,66.751 ; v1@98.214,67.839 cw(c97.877,67.377) 98.441,67.466 ; v1@98.214,67.839 cw(c97.877,67.377) 98.441,67.466 ; v1@98.214,67.839 cw(c97.877,67.377) 98.441,67.466 ; v1@98.223,68.006 ccw(c97.937,68.501) 98.489,68.353 ; v1@98.223,68.006 ccw(c97.937,68.501) 98.489,68.353 ; v1@98.223,68.006 ccw(c97.937,68.501) 98.489,68.353 ; v1@98.372,67.909 ccw(c99.786,67.757) 98.781,66.751 ; v1@98.372,67.909 ccw(c99.786,67.757) 98.781,66.751 ; v1@98.372,67.909 ccw(c99.786,67.757) 98.781,66.751 ; v1@98.373,67.92 cw(c99.411,67.92) 98.677,68.654 ; v1@98.373,67.92 cw(c99.411,67.92) 98.677,68.654 ; v1@98.373,67.92 cw(c99.411,67.92) 98.677,68.654 ; 98.489,68.466 cw(c99.136,67.818) v1@99.136,68.734 ; 98.489,68.466 cw(c99.136,67.818) v1@99.136,68.734 ; 98.489,68.466 cw(c99.136,67.818) v1@99.136,68.734 ; 98.618,67.26 cw(c98.58,66.69) v1@99.01,67.066 ; 98.618,67.26 cw(c98.58,66.69) v1@99.01,67.066 ; 98.618,67.26 cw(c98.58,66.69) v1@99.01,67.066 ; 98.703,68.618 ccw(c98.555,69.17) v1@99.05,68.884 ; 98.703,68.618 ccw(c98.555,69.17) v1@99.05,68.884 ; 98.703,68.618 ccw(c98.555,69.17) v1@99.05,68.884 ; 98.781,66.24 cw(c99.865,66.24) v1@99.151,67.057 ; 98.781,66.24 cw(c99.865,66.24) v1@99.151,67.057 ; 98.781,66.24 cw(c99.865,66.24) v1@99.151,67.057 ; 98.781,66.294 ccw(c99.265,66.779) v1@99.596,66.178 ; 98.781,66.294 ccw(c99.265,66.779) v1@99.596,66.178 ; 98.781,66.294 ccw(c99.265,66.779) v1@99.596,66.178 ; 98.781,66.294 99.136,65.938 ; 98.781,66.294 98.781,66.751 ; 98.781,66.644 cw(c99.177,66.644) v1@99.104,67.034 ; 98.781,66.644 cw(c99.177,66.644) v1@99.104,67.034 ; 98.781,66.644 cw(c99.177,66.644) v1@99.104,67.034 ; 98.781,66.644 cw(c99.177,66.644) v1@99.104,67.034 ; 98.781,66.644 cw(c99.177,66.644) v1@99.104,67.034 ; 98.781,66.644 cw(c99.177,66.644) v1@99.104,67.034 ; 98.781,66.751 v1@99.593,65.938 ; v1@98.781,67.247 cw(c99.064,67.247) 99.012,67.525 ; v1@98.781,67.247 cw(c99.064,67.247) 99.012,67.525 ; v1@98.781,67.247 cw(c99.064,67.247) 99.012,67.525 ; 98.901,66.684 ccw(c98.427,67.002) v1@98.987,67.113 ; 98.901,66.684 ccw(c98.427,67.002) v1@98.987,67.113 ; 98.901,66.684 ccw(c98.427,67.002) v1@98.987,67.113 ; v1@99.025,67.052 cw(c98.683,66.595) 99.248,66.676 ; v1@99.025,67.052 cw(c98.683,66.595) 99.248,66.676 ; v1@99.025,67.052 cw(c98.683,66.595) 99.248,66.676 ; v1@99.032,67.048 cw(c98.306,65.894) v1@99.67,65.894 ; v1@99.032,67.048 cw(c98.306,65.894) v1@99.67,65.894 ; v1@99.032,67.048 cw(c98.306,65.894) v1@99.67,65.894 ; v1@99.086,68.921 ccw(c98.801,69.415) 99.352,69.267 ; v1@99.086,68.921 ccw(c98.801,69.415) 99.352,69.267 ; v1@99.086,68.921 ccw(c98.801,69.415) 99.352,69.267 ; v1@99.11,68.931 ccw(c98.962,69.482) 99.457,69.197 ; v1@99.11,68.931 ccw(c98.962,69.482) 99.457,69.197 ; v1@99.11,68.931 ccw(c98.962,69.482) 99.457,69.197 ; v1@99.11,68.931 ccw(c98.962,69.482) 99.457,69.197 ; 99.127,66.405 ccw(c99.644,66.923) v1@99.644,66.191 ; 99.127,66.405 ccw(c99.644,66.923) v1@99.644,66.191 ; 99.127,66.405 ccw(c99.644,66.923) v1@99.644,66.191 ; 99.136,65.938 ccw(c99.136,66.476) v1@99.565,66.151 ; 99.136,65.938 ccw(c99.136,66.476) v1@99.565,66.151 ; 99.136,65.938 ccw(c99.136,66.476) v1@99.565,66.151 ; 99.136,65.938 v1@99.593,65.938 ; v1@99.136,68.934 ccw(c99.136,69.911) 99.827,69.22 ; v1@99.136,68.934 ccw(c99.136,70.954) v1@100.564,69.526 ; v1@99.136,68.934 ccw(c99.136,69.911) 99.827,69.22 ; v1@99.136,68.934 ccw(c99.136,70.954) v1@100.564,69.526 ; v1@99.136,68.934 ccw(c99.136,69.911) 99.827,69.22 ; v1@99.136,68.934 ccw(c99.136,70.954) v1@100.564,69.526 ; v1@99.137,69.114 cw(c100.305,67.946) v1@100.305,69.598 ; v1@99.137,69.114 cw(c100.305,67.946) v1@100.305,69.598 ; v1@99.137,69.114 cw(c100.305,67.946) v1@100.305,69.598 ; v1@99.136,69.113 99.136,69.926 ; v1@99.136,69.113 100.66,70.637 ; 99.136,69.926 ccw(c98.546,70.517) v1@99.277,70.919 ; 99.136,69.926 ccw(c98.546,70.517) v1@99.277,70.919 ; 99.136,69.926 ccw(c98.546,70.517) v1@99.277,70.919 ; 99.136,69.926 99.644,69.926 100.94,71.222 ; 99.136,69.926 99.136,70.231 ; 99.136,69.926 100.635,71.425 ; 99.136,70.196 cw(c100.106,70.196) v1@99.434,70.895 ; 99.136,70.196 cw(c100.106,70.196) v1@99.434,70.895 ; 99.136,70.196 cw(c100.106,70.196) v1@99.434,70.895 ; 99.136,70.231 99.136,70.688 ; 99.136,70.231 99.2,70.294 ; 99.136,70.688 99.136,70.968 99.822,71.653 100.101,71.653 ; 99.136,70.688 100.101,71.653 ; v1@99.185,67.12 ccw(c100.605,66.95) v1@99.593,65.938 ; v1@99.185,67.12 ccw(c100.605,66.95) v1@99.593,65.938 ; v1@99.185,67.12 ccw(c100.605,66.95) v1@99.593,65.938 ; v1@99.185,67.128 ccw(c99.756,67.107) 99.337,66.718 ; v1@99.185,67.128 ccw(c99.756,67.107) 99.337,66.718 ; v1@99.185,67.128 ccw(c99.756,67.107) 99.337,66.718 ; v1@99.187,68.504 cw(c99.187,67.573) MO.2@99.971,68.075 ; v1@99.187,68.504 cw(c99.187,67.573) MO.2@99.971,68.075 ; v1@99.187,68.504 cw(c99.187,67.573) MO.2@99.971,68.075 ; v1@99.187,68.504 99.187,68.58 v1(100.305,69.698) 100.736,70.129 100.889,70.129 ; v1@99.187,68.504 99.543,68.504 ; 99.2,70.295 ccw(c98.838,70.657) v1@99.279,70.917 ; 99.2,70.295 ccw(c98.838,70.657) v1@99.279,70.917 ; 99.2,70.295 ccw(c98.838,70.657) v1@99.279,70.917 ; 99.2,70.294 100.482,71.577 100.635,71.425 ; 99.202,70.511 ccw(c98.713,70.807) v1@99.268,70.944 ; 99.202,70.511 ccw(c98.713,70.807) v1@99.268,70.944 ; 99.202,70.511 ccw(c98.713,70.807) v1@99.268,70.944 ; 99.211,66.307 cw(c99.063,65.755) v1@99.558,66.041 ; 99.211,66.307 cw(c99.063,65.755) v1@99.558,66.041 ; 99.211,66.307 cw(c99.063,65.755) v1@99.558,66.041 ; v1@99.223,68.784 cw(c99.717,68.498) 99.57,69.05 ; v1@99.223,68.784 cw(c99.717,68.498) 99.57,69.05 ; v1@99.223,68.784 cw(c99.717,68.498) 99.57,69.05 ; v1@99.223,68.784 cw(c99.717,68.498) 99.57,69.05 ; v1@99.223,68.784 cw(c99.717,68.498) 99.57,69.05 ; v1@99.223,68.784 cw(c99.717,68.498) 99.57,69.05 ; v1@99.233,68.808 cw(c100.264,68.532) 99.73,69.457 ; v1@99.233,68.808 cw(c100.264,68.532) 99.73,69.457 ; v1@99.233,68.808 cw(c100.264,68.532) 99.73,69.457 ; v1@99.233,68.808 cw(c100.264,68.532) 99.73,69.457 ; v1@99.233,68.808 cw(c100.264,68.532) 99.73,69.457 ; v1@99.233,68.808 cw(c100.264,68.532) 99.73,69.457 ; v1@99.236,68.834 cw(c100.152,68.834) 99.504,69.482 ; v1@99.236,68.834 cw(c100.152,68.834) 99.504,69.482 ; v1@99.236,68.834 cw(c100.152,68.834) 99.504,69.482 ; 99.274,66.491 ccw(c99.839,66.817) v1@99.67,66.187 ; 99.274,66.491 ccw(c99.839,66.817) v1@99.67,66.187 ; 99.274,66.491 ccw(c99.839,66.817) v1@99.67,66.187 ; 99.274,66.491 ccw(c99.839,66.817) v1@99.67,66.187 ; 99.274,66.491 ccw(c99.839,66.817) v1@99.67,66.187 ; 99.274,66.491 ccw(c99.839,66.817) v1@99.67,66.187 ; 99.298,67.471 cw(c98.876,66.799) 99.67,66.799 ; 99.298,67.471 cw(c98.876,66.799) 99.67,66.799 ; 99.298,67.471 cw(c98.876,66.799) 99.67,66.799 ; v1@99.315,71.054 ccw(c99.029,71.549) 99.581,71.401 ; v1@99.315,71.054 ccw(c99.029,71.549) 99.581,71.401 ; v1@99.315,71.054 ccw(c99.029,71.549) 99.581,71.401 ; 99.365,70.568 ccw(c99.365,70.828) 99.549,70.644 ; 99.365,70.568 ccw(c99.365,70.828) 99.549,70.644 ; 99.365,70.568 ccw(c99.365,70.828) 99.549,70.644 ; v1@99.365,71.068 ccw(c99.365,72.535) 100.403,71.498 ; v1@99.365,71.068 ccw(c99.365,72.535) 100.403,71.498 ; v1@99.365,71.068 ccw(c99.365,72.535) 100.403,71.498 ; v1@99.387,71.065 ccw(c99.685,72.374) 100.635,71.425 ; v1@99.387,71.065 ccw(c99.685,72.374) 100.635,71.425 ; v1@99.387,71.065 ccw(c99.685,72.374) 100.635,71.425 ; v1@99.438,70.9 cw(c99.857,70.511) 99.835,71.082 ; v1@99.438,70.9 cw(c99.857,70.511) 99.835,71.082 ; v1@99.438,70.9 cw(c99.857,70.511) 99.835,71.082 ; v1@99.451,70.918 cw(c99.946,70.632) 99.798,71.184 ; v1@99.451,70.918 cw(c99.946,70.632) 99.798,71.184 ; v1@99.451,70.918 cw(c99.946,70.632) 99.798,71.184 ; v1@99.465,70.968 cw(c100.258,70.968) 99.697,71.529 ; v1@99.465,70.968 cw(c100.258,70.968) 99.697,71.529 ; v1@99.465,70.968 cw(c100.258,70.968) 99.697,71.529 ; 99.543,68.504 cw(c99.543,68.12) MO.2@99.918,68.203 ; 99.543,68.504 cw(c99.543,68.12) MO.2@99.918,68.203 ; 99.543,68.504 cw(c99.543,68.12) MO.2@99.918,68.203 ; 99.543,68.504 v1@100.584,69.545 ; v1@99.593,65.938 v1@99.924,65.938 ; v1@99.594,66.177 ccw(c99.346,66.608) 99.826,66.479 ; v1@99.594,66.177 ccw(c99.346,66.608) 99.826,66.479 ; v1@99.594,66.177 ccw(c99.346,66.608) 99.826,66.479 ; v1@99.594,66.177 ccw(c99.346,66.608) 99.826,66.479 ; v1@99.594,66.177 ccw(c99.346,66.608) 99.826,66.479 ; v1@99.594,66.177 ccw(c99.346,66.608) 99.826,66.479 ; 99.652,68.999 ccw(c99.055,70.032) v1@100.208,69.723 ; 99.652,68.999 ccw(c99.055,70.032) v1@100.208,69.723 ; 99.652,68.999 ccw(c99.055,70.032) v1@100.208,69.723 ; 99.656,70.751 ccw(c99.412,70.995) 99.709,71.171 ; 99.656,70.751 ccw(c99.412,70.995) 99.709,71.171 ; 99.656,70.751 ccw(c99.412,70.995) 99.709,71.171 ; v1@99.67,65.897 cw(c100.863,65.897) MO.2@100.447,67.015 ; v1@99.67,65.897 cw(c100.863,65.897) MO.2@100.447,67.015 ; v1@99.67,65.897 cw(c100.863,65.897) MO.2@100.447,67.015 ; 99.67,66.616 cw(c100.596,66.616) MO.2@100.273,67.484 ; 99.67,66.616 cw(c100.596,66.616) MO.2@100.273,67.484 ; 99.67,66.616 cw(c100.596,66.616) MO.2@100.273,67.484 ; v1@99.689,66.001 cw(c99.84,65.701) 100.008,65.992 ; v1@99.689,66.001 cw(c99.84,65.701) 100.008,65.992 ; v1@99.689,66.001 cw(c99.84,65.701) 100.008,65.992 ; v1@99.715,66.162 ccw(c100.254,66.7) 100.254,65.938 ; v1@99.715,66.162 ccw(c100.254,66.7) 100.254,65.938 ; v1@99.715,66.162 ccw(c100.254,66.7) 100.254,65.938 ; MO.2@99.829,68.79 ccw(c98.921,69.698) v1@100.205,69.698 ; MO.2@99.829,68.79 ccw(c98.921,69.698) v1@100.205,69.698 ; MO.2@99.829,68.79 ccw(c98.921,69.698) v1@100.205,69.698 ; 99.834,66.58 ccw(c99.568,66.954) MO.2@99.963,67.187 ; 99.834,66.58 ccw(c99.568,66.954) MO.2@99.963,67.187 ; 99.834,66.58 ccw(c99.568,66.954) MO.2@99.963,67.187 ; 99.871,69.481 ccw(c99.723,70.033) v1@100.218,69.748 ; 99.871,69.481 ccw(c99.723,70.033) v1@100.218,69.748 ; 99.871,69.481 ccw(c99.723,70.033) v1@100.218,69.748 ; 99.916,69.604 cw(c100.331,69.704) 100.029,70.006 ; 99.916,69.604 cw(c100.331,69.704) 100.029,70.006 ; 99.916,69.604 cw(c100.331,69.704) 100.029,70.006 ; 99.919,69.741 cw(c100.273,69.731) 100.029,69.988 ; 99.919,69.741 cw(c100.273,69.731) 100.029,69.988 ; 99.919,69.741 cw(c100.273,69.731) 100.029,69.988 ; 99.919,69.741 cw(c100.273,69.731) 100.029,69.988 ; 99.919,69.741 cw(c100.273,69.731) 100.029,69.988 ; 99.919,69.741 cw(c100.273,69.731) 100.029,69.988 ; v1@99.924,65.938 100.711,65.938 100.94,66.167 100.94,70.129 ; 99.964,65.938 ccw(c99.964,66.787) v1@100.564,66.187 ; 99.964,65.938 ccw(c99.964,66.787) v1@100.564,66.187 ; 99.964,65.938 ccw(c99.964,66.787) v1@100.564,66.187 ; 99.99,69.967 cw(c100.305,69.653) 100.305,70.098 ; 99.99,69.967 cw(c100.305,69.653) 100.305,70.098 ; 99.99,69.967 cw(c100.305,69.653) 100.305,70.098 ; MO.2@100.078,67.063 cw(c99.389,66.087) v1@100.584,66.087 ; MO.2@100.078,67.063 cw(c99.389,66.087) v1@100.584,66.087 ; MO.2@100.078,67.063 cw(c99.389,66.087) v1@100.584,66.087 ; MO.2@100.088,68.624 ccw(c99.481,69.545) v1@100.584,69.545 ; MO.2@100.088,68.624 ccw(c99.481,69.545) v1@100.584,69.545 ; MO.2@100.088,68.624 ccw(c99.481,69.545) v1@100.584,69.545 ; 100.088,69.264 cw(c100.64,69.116) v1@100.355,69.611 ; 100.088,69.264 cw(c100.64,69.116) v1@100.355,69.611 ; 100.088,69.264 cw(c100.64,69.116) v1@100.355,69.611 ; MO.2@100.099,68.632 ccw(c99.185,70.129) 100.94,70.129 ; MO.2@100.099,68.632 ccw(c99.185,70.129) 100.94,70.129 ; MO.2@100.099,68.632 ccw(c99.185,70.129) 100.94,70.129 ; 100.101,71.653 100.508,71.653 ; MO.2@100.196,67.006 cw(c99.905,66.014) v1@100.94,66.014 ; MO.2@100.196,67.006 cw(c99.905,66.014) v1@100.94,66.014 ; MO.2@100.196,67.006 cw(c99.905,66.014) v1@100.94,66.014 ; 100.232,65.995 cw(c100.444,65.628) v1@100.598,66.023 ; 100.232,65.995 cw(c100.444,65.628) v1@100.598,66.023 ; 100.232,65.995 cw(c100.444,65.628) v1@100.598,66.023 ; v1@100.234,69.627 cw(c99.389,68.782) MO.2@100.584,68.782 ; v1@100.234,69.627 cw(c99.389,68.782) MO.2@100.584,68.782 ; v1@100.234,69.627 cw(c99.389,68.782) MO.2@100.584,68.782 ; v1@100.236,69.77 ccw(c99.842,70.184) 100.413,70.17 ; v1@100.236,69.77 ccw(c99.842,70.184) 100.413,70.17 ; v1@100.236,69.77 ccw(c99.842,70.184) 100.413,70.17 ; v1@100.328,69.795 ccw(c100.466,70.376) 100.889,69.954 ; v1@100.328,69.795 ccw(c100.466,70.376) 100.889,69.954 ; v1@100.328,69.795 ccw(c100.466,70.376) 100.889,69.954 ; MO.2@100.336,67.486 cw(c100.1,66.681) 100.94,66.681 ; MO.2@100.336,67.486 cw(c100.1,66.681) 100.94,66.681 ; MO.2@100.336,67.486 cw(c100.1,66.681) 100.94,66.681 ; v1@100.343,69.79 ccw(c100.511,70.192) 100.819,69.884 ; v1@100.343,69.79 ccw(c100.511,70.192) 100.819,69.884 ; v1@100.343,69.79 ccw(c100.511,70.192) 100.819,69.884 ; MO.2@100.36,68.205 ccw(c99.729,69.238) 100.94,69.238 ; MO.2@100.36,68.205 ccw(c99.729,69.238) 100.94,69.238 ; MO.2@100.36,68.205 ccw(c99.729,69.238) 100.94,69.238 ; v1@100.401,69.672 ccw(c100.953,69.524) 100.458,69.238 ; v1@100.401,69.672 ccw(c100.953,69.524) 100.458,69.238 ; v1@100.401,69.672 ccw(c100.953,69.524) 100.458,69.238 ; v1@100.402,69.721 cw(c101.349,69.949) 100.66,70.637 ; v1@100.402,69.721 cw(c101.349,69.949) 100.66,70.637 ; v1@100.402,69.721 cw(c101.349,69.949) 100.66,70.637 ; 100.482,66.467 ccw(c100.902,66.58) v1@100.685,66.203 ; 100.482,66.467 ccw(c100.902,66.58) v1@100.685,66.203 ; 100.482,66.467 ccw(c100.902,66.58) v1@100.685,66.203 ; 100.482,66.467 ccw(c100.902,66.58) v1@100.685,66.203 ; 100.482,66.467 ccw(c100.902,66.58) v1@100.685,66.203 ; 100.482,66.467 ccw(c100.902,66.58) v1@100.685,66.203 ; 100.508,71.653 100.94,71.222 ; 100.508,71.653 100.711,71.653 100.94,71.425 100.94,71.222 ; v1@100.564,66.187 ccw(c99.658,67.093) MO.2@100.94,67.093 ; v1@100.564,66.187 ccw(c99.658,67.093) MO.2@100.94,67.093 ; v1@100.564,66.187 ccw(c99.658,67.093) MO.2@100.94,67.093 ; 100.584,66.48 ccw(c100.999,66.48) v1@100.706,66.187 ; 100.584,66.48 ccw(c100.999,66.48) v1@100.706,66.187 ; 100.584,66.48 ccw(c100.999,66.48) v1@100.706,66.187 ; MO.2@100.643,68.509 cw(c101.162,68.849) 100.713,69.276 ; MO.2@100.643,68.509 cw(c101.162,68.849) 100.713,69.276 ; MO.2@100.643,68.509 cw(c101.162,68.849) 100.713,69.276 ; 100.66,70.637 100.94,70.637 ; MO.2@100.662,67.205 ccw(c101.053,67.001) 100.824,66.624 ; MO.2@100.662,67.205 ccw(c101.053,67.001) 100.824,66.624 ; MO.2@100.662,67.205 ccw(c101.053,67.001) 100.824,66.624 ; v1@100.731,66.142 cw(c101.283,66.29) 100.788,66.576 ; v1@100.731,66.142 cw(c101.283,66.29) 100.788,66.576 ; v1@100.731,66.142 cw(c101.283,66.29) 100.788,66.576 ; 100.819,69.884 100.889,69.954 ; 100.889,69.954 100.889,70.129 ; 100.889,70.129 100.94,70.129 ; 100.94,70.129 100.94,70.637 ; 100.94,70.637 100.94,71.222
  other v1: 100.635,66.116 99.085,67.132 99.365,70.968